# Altium PCB Main.PcbDoc (part 1 of 2)
Units mil, origin at the board's own origin, x right, y up, seen from the top; angles counter-clockwise.
Board outline 12846.15 x 9153.85 mil, 2 copper layers (TopLayer, BottomLayer); 186 components, 153 nets, 590 pads, 304 vias.
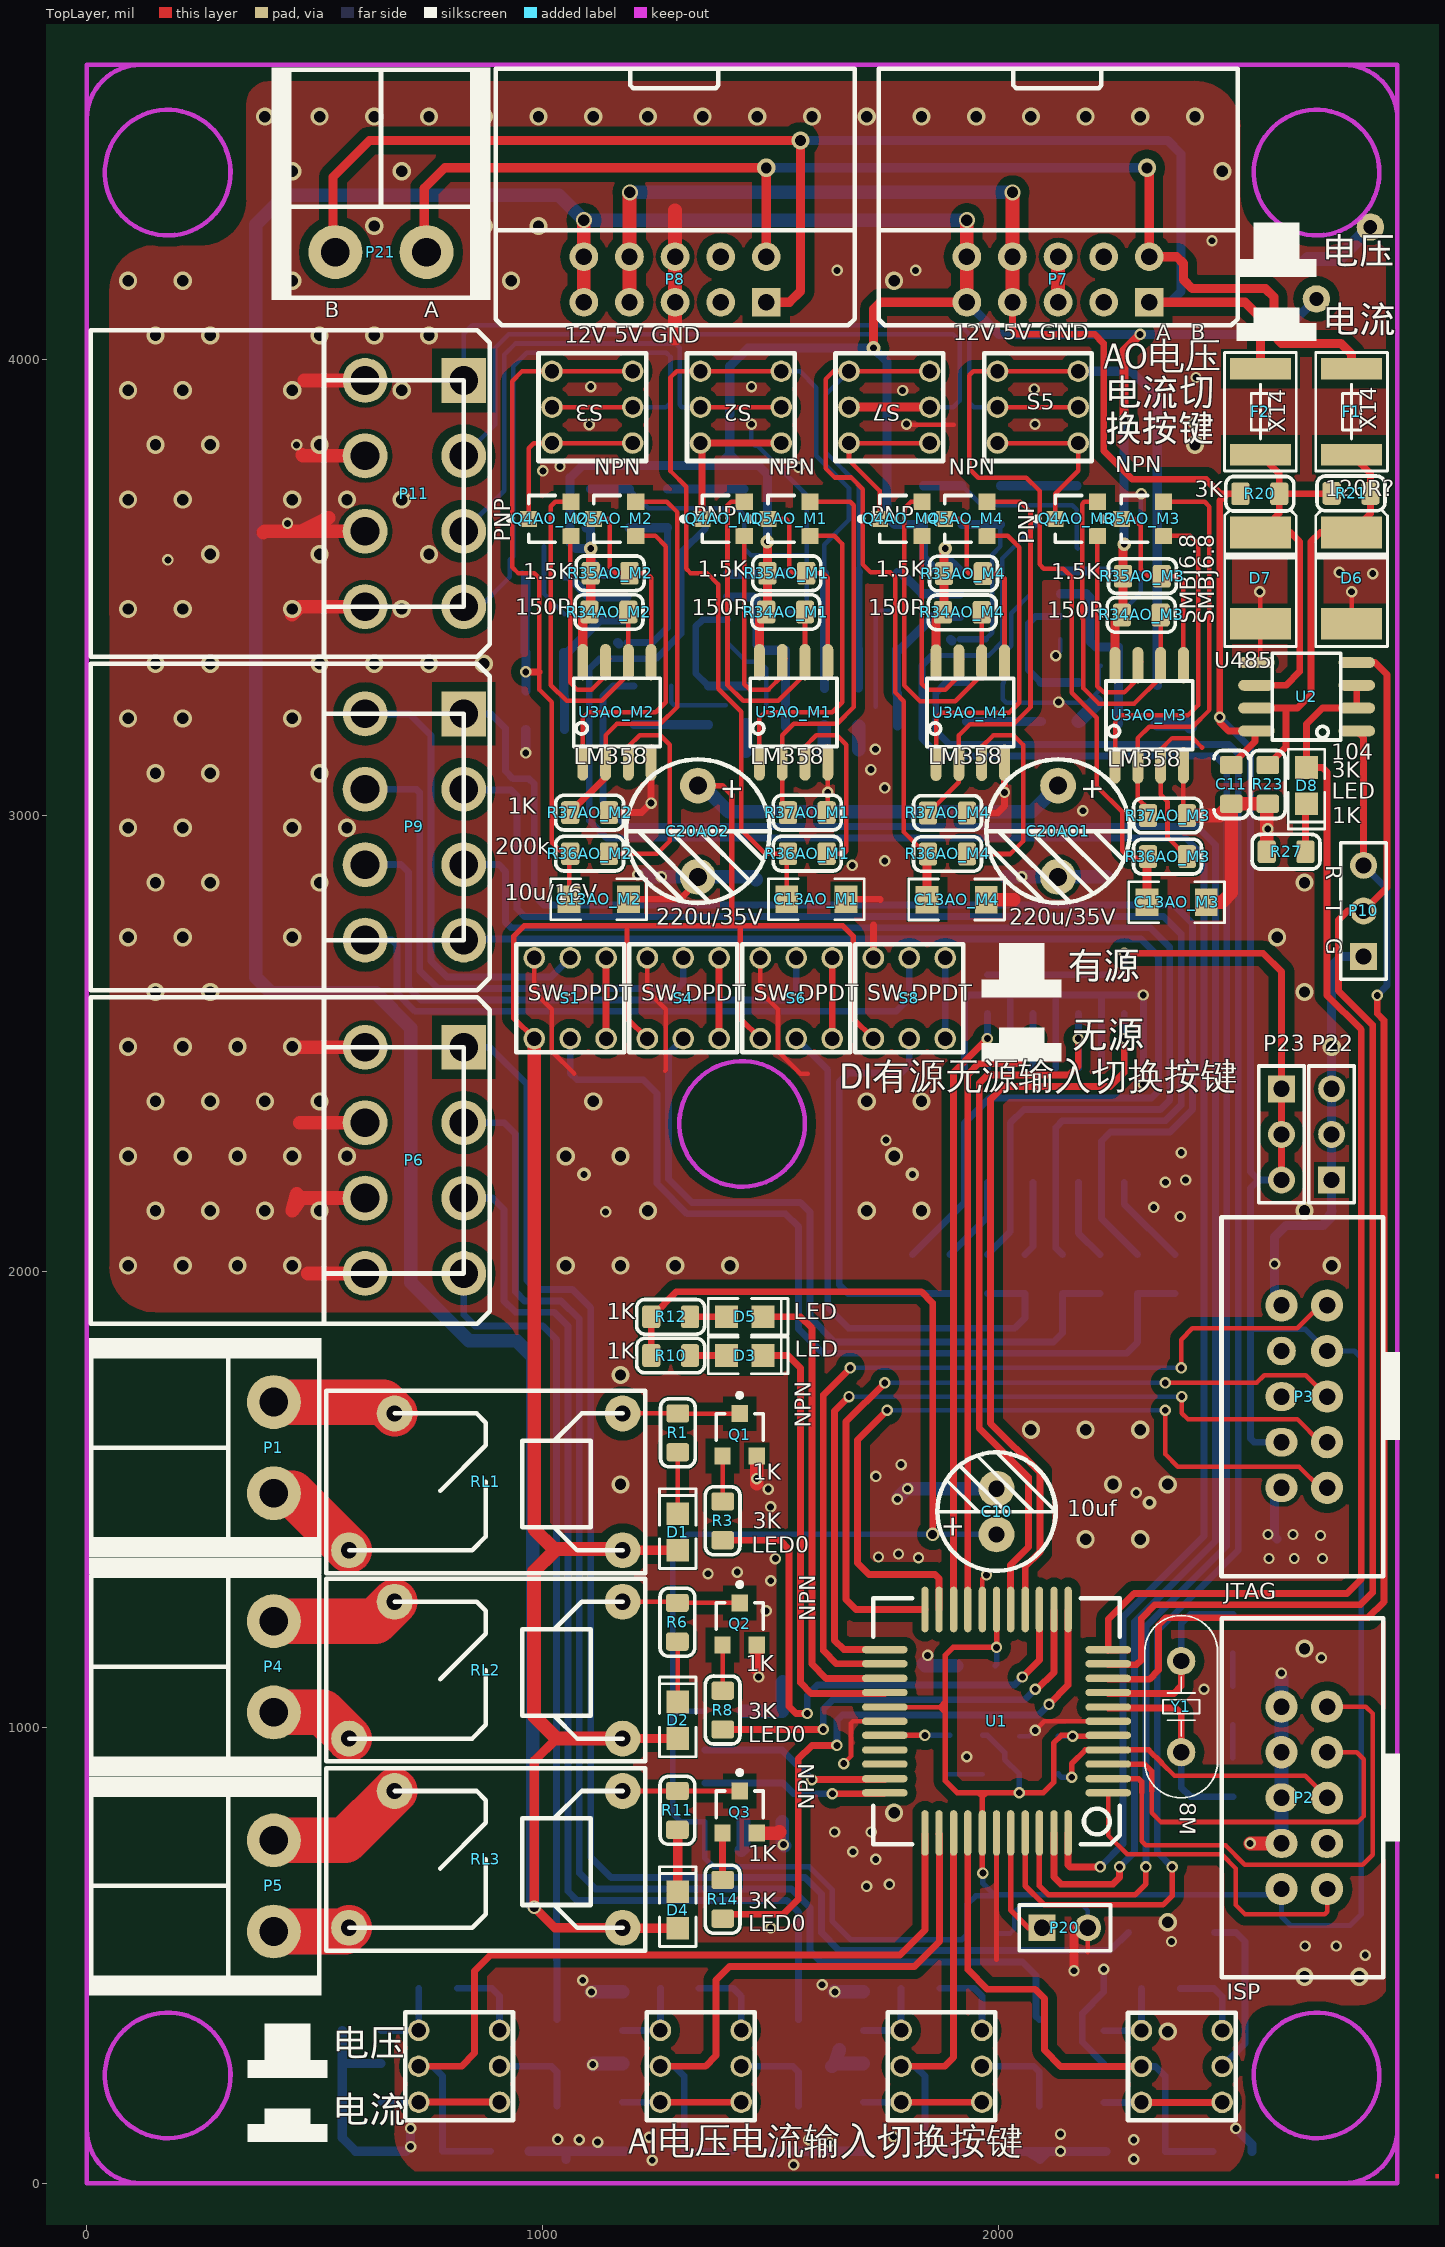
[diagram p0: TopLayer view]
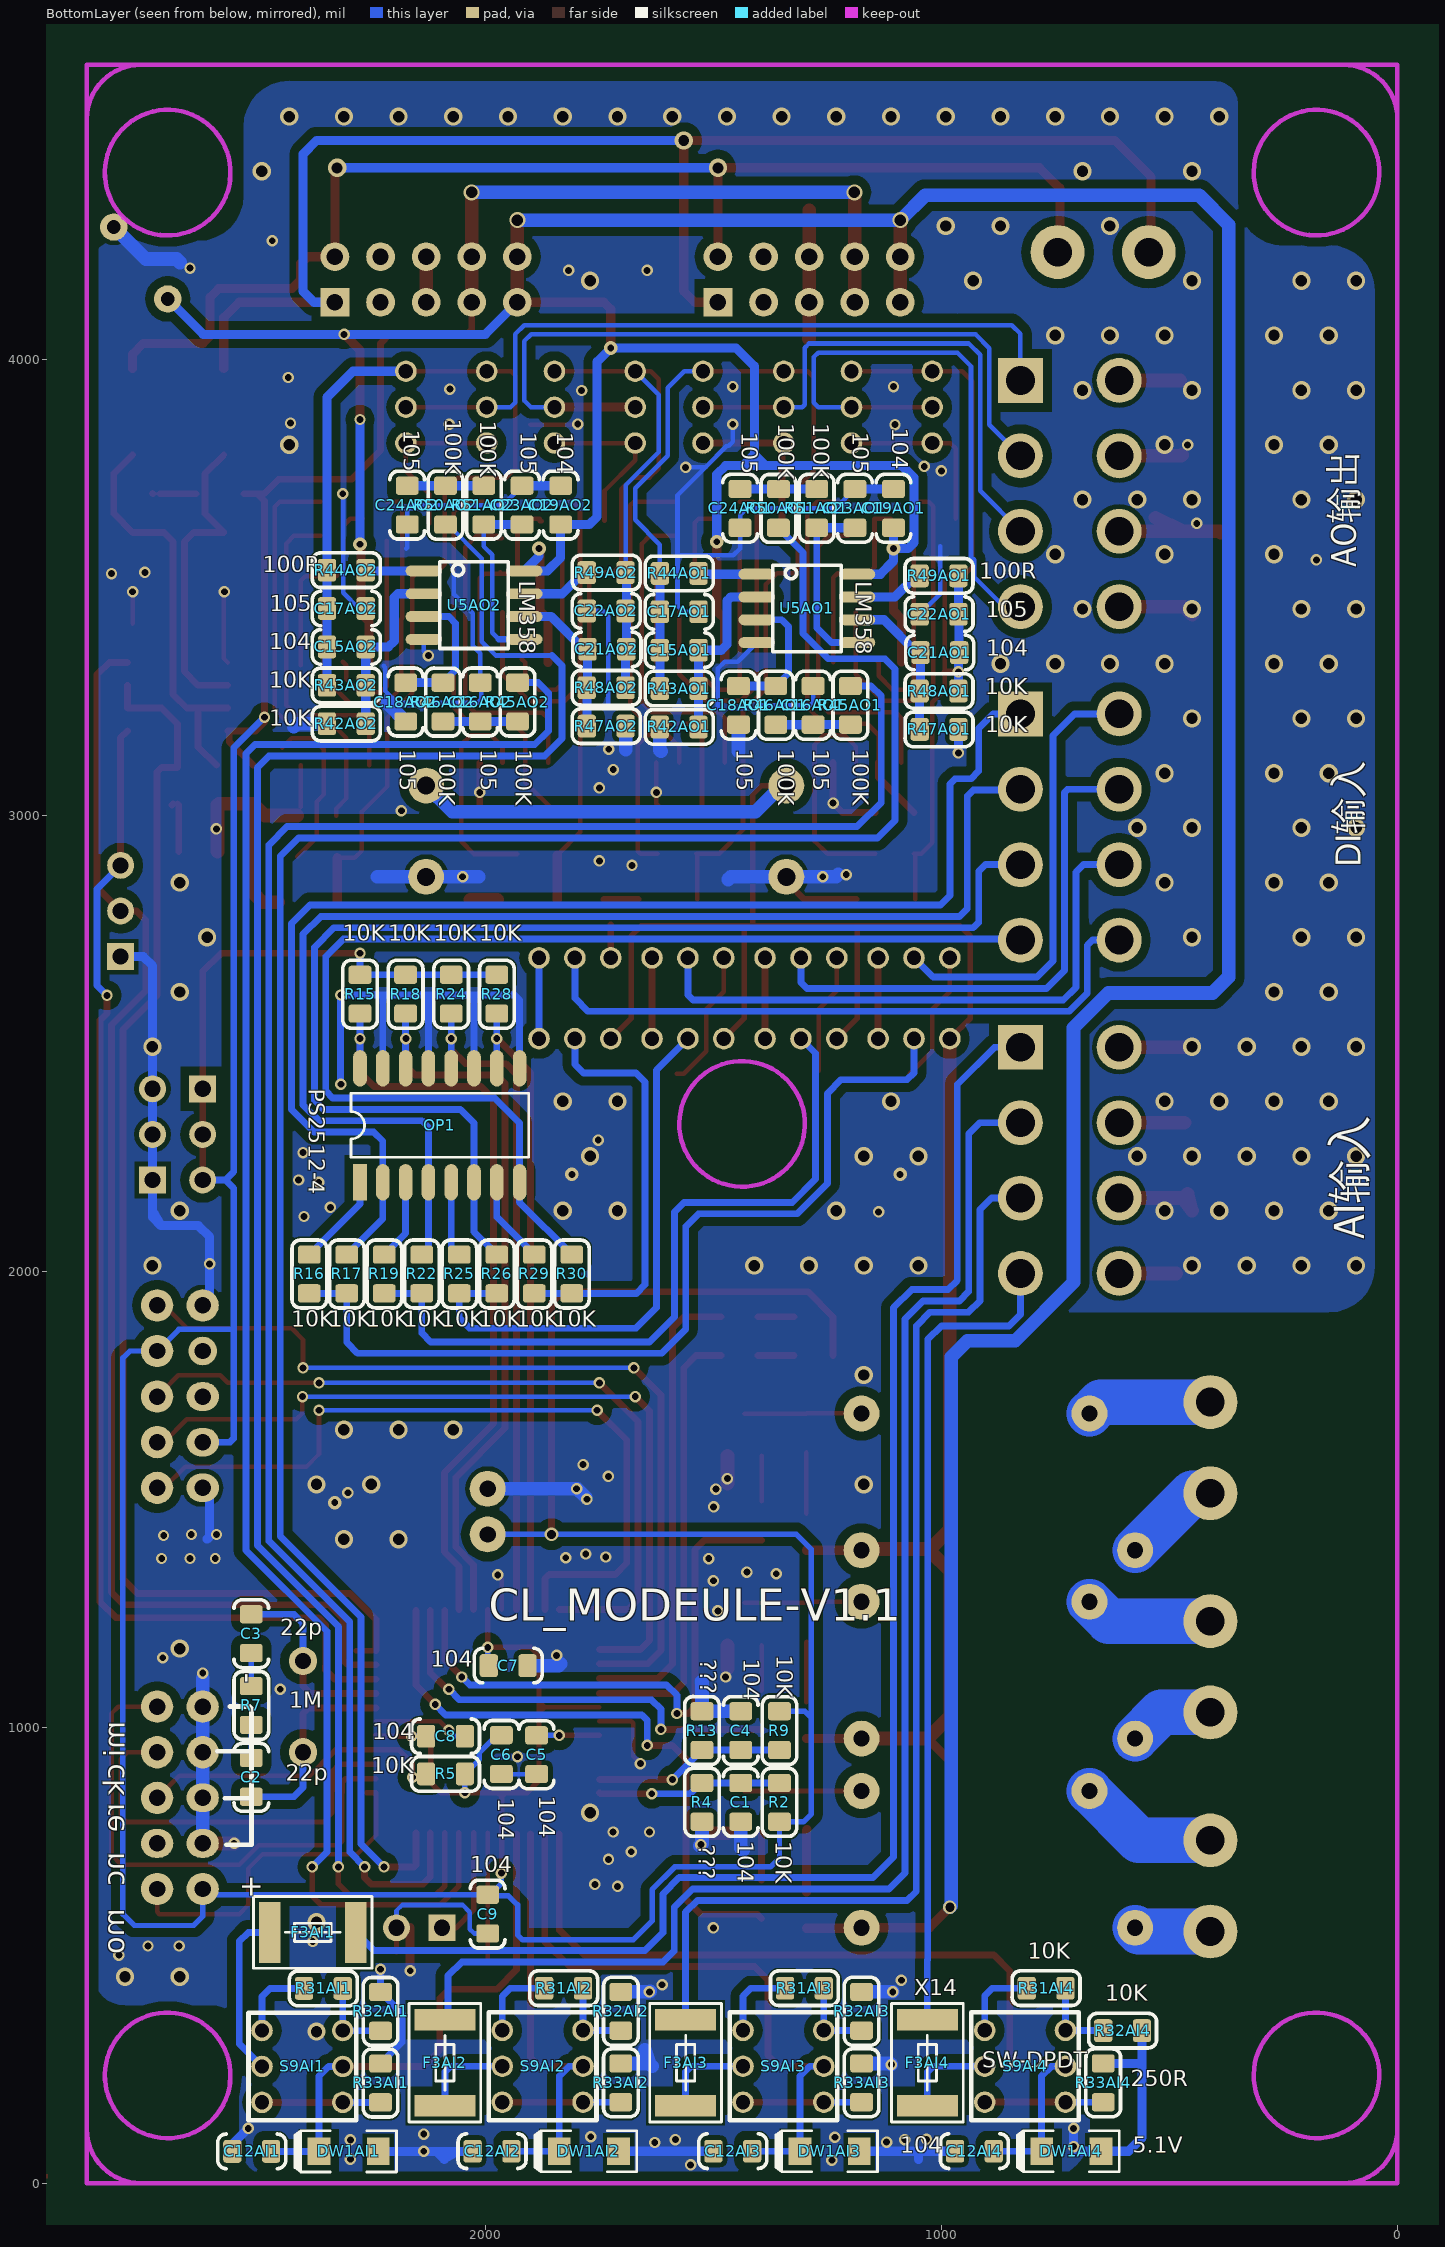
[diagram p1: BottomLayer view, seen from below]
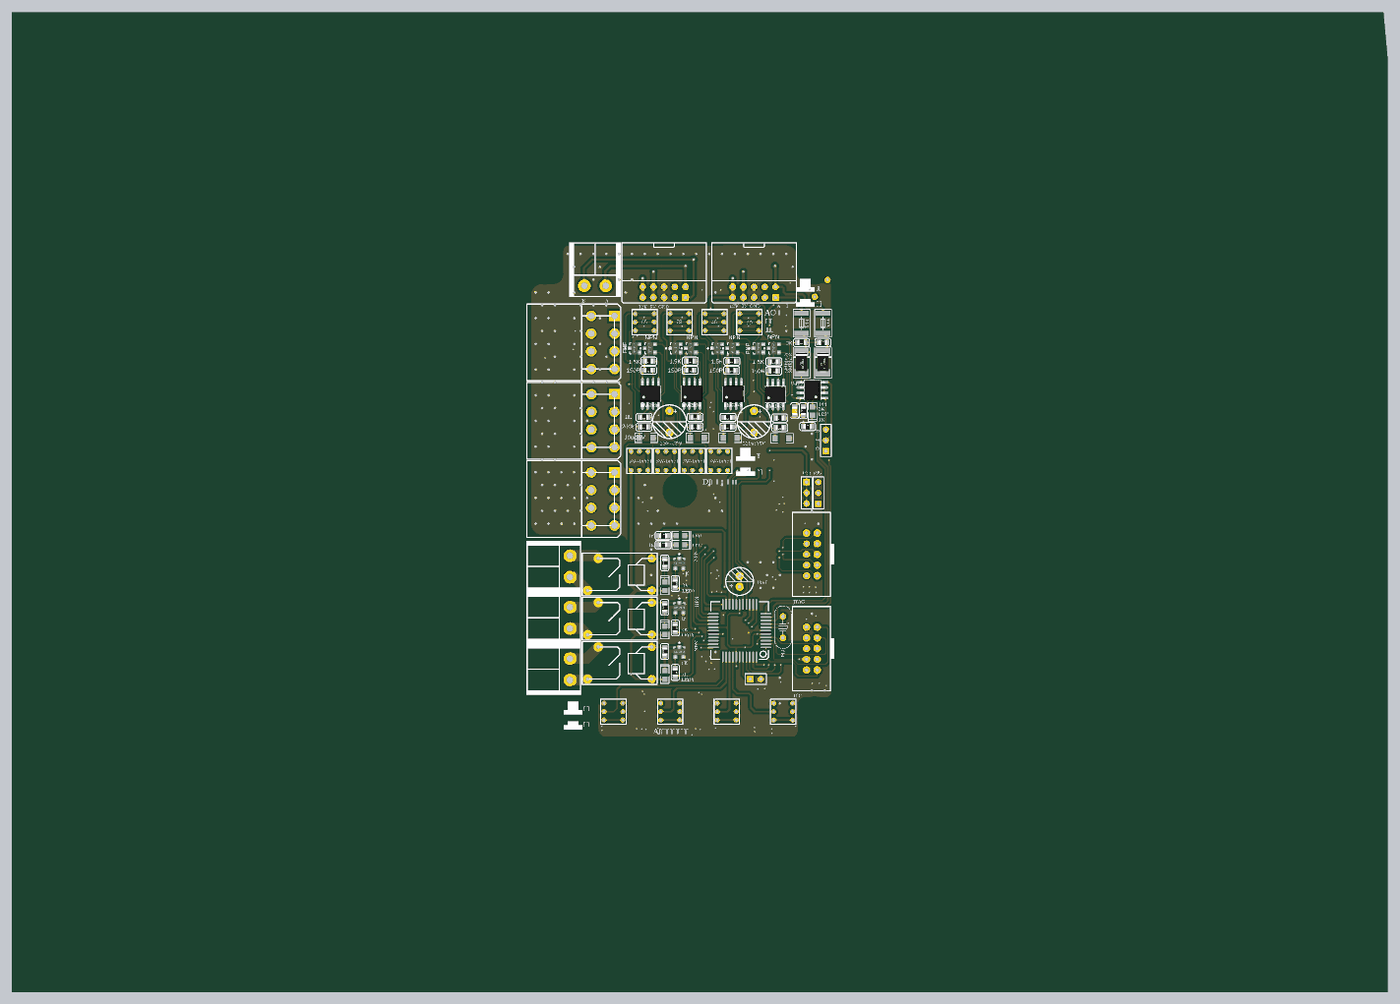
[diagram p3: 3D render of the assembled board from above, using the file's embedded part models]
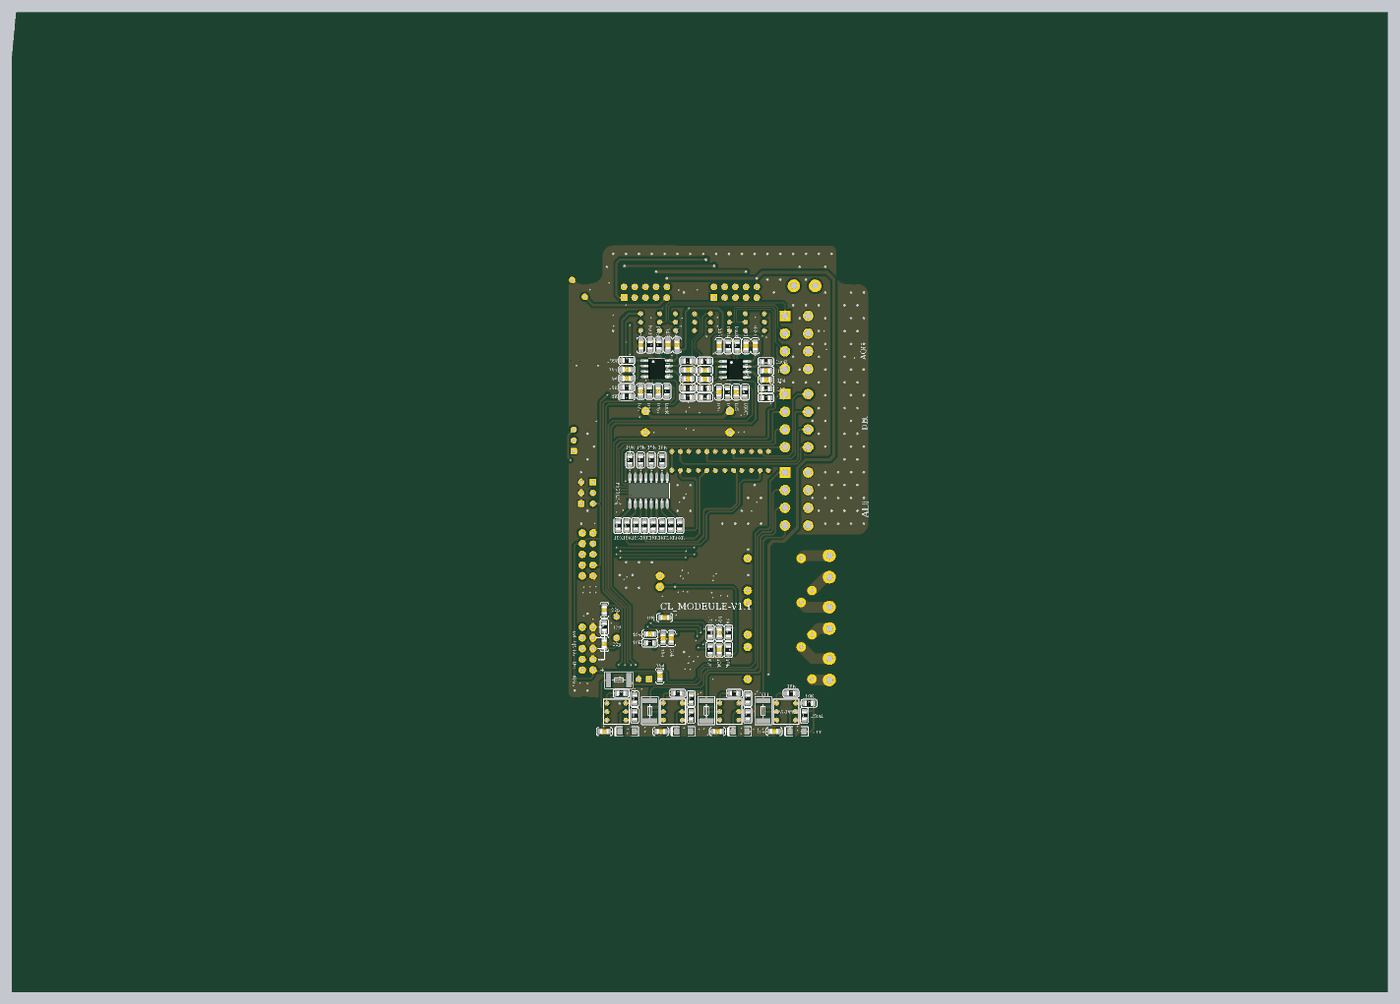
[diagram p4: 3D render of the assembled board from below, using the file's embedded part models]

## Layer stack, top to bottom
TopSolder: solder mask 0.4, Solder Resist, Dk 3.5
TopLayer: signal copper 1.4
Dielectric1: dielectric 12.6, FR-4, Dk 4.8
BottomLayer: signal copper 1.4
BottomSolder: solder mask 0.4, Solder Resist, Dk 3.5

## Board outline
8007.31,6789.27 -4800.38,6789.27 -4800.38,-2364.57 8045.77,-2364.57 8045.77,6366.19

## Design rules (kind name [scope] priority, off if disabled: settings)
Clearance Clearance_1 [All] p1 off: gap=20
Clearance [All] p2: gap=10
ComponentClearance [All] p1 off: gap=10 collisioncheckmode=3 verticalgap=10 showdistances=FALSE
FabricationTestPointUsage TestPointUsage [All] p1: valid=0 allowmultiple=FALSE
FabricationTestpoint Testpoint [All] p1: side=3 testpointundercomponent=TRUE minsize=40 maxsize=100 preferedsize=60 minholesize=20 maxholesize=40 preferedholesize=32 testpointgrid=1 allowsidetop=TRUE allowsidebottom=TRUE usegrid=TRUE gridtolerance=0.01
PolygonConnect PolygonConnect_1 [All vs (InPadClass('All Pads'))] p1: connectstyle=NoConnect reliefconductorwidth=10 reliefentries=4 polygonreliefangle="90 Angle" airgapwidth=10
PolygonConnect [All] p2: connectstyle=Direct reliefconductorwidth=10 reliefentries=4 polygonreliefangle="90 Angle" airgapwidth=10
RoomDefinition AI1 [InComponentClass('AI1')] p1: confinementstyle=ConfineIn formatcopy=TRUE lockcomponents=FALSE outline 2175,-31.9 2175,499.62 2735,499.62 2735,-31.9
RoomDefinition AI2 [InComponentClass('AI2')] p2: confinementstyle=ConfineIn formatcopy=TRUE lockcomponents=FALSE outline 1647.98,-31.53 1647.98,499.99 2207.98,499.99 2207.98,-31.53
RoomDefinition AI3 [InComponentClass('AI3')] p3: confinementstyle=ConfineIn formatcopy=TRUE lockcomponents=FALSE outline 1120,-31.53 1120,499.99 1680,499.99 1680,-31.53
RoomDefinition AI4 [InComponentClass('AI4')] p4: confinementstyle=ConfineIn formatcopy=TRUE lockcomponents=FALSE outline 590,-31.52 590,500 1150,500 1150,-31.52
RoomDefinition AO_M1 [InComponentClass('AO_M1')] p5: confinementstyle=ConfineIn formatcopy=TRUE lockcomponents=FALSE outline 6150,4915 5170,4915 5170,5300 6150,5300
RoomDefinition AO_M2 [InComponentClass('AO_M2')] p6: confinementstyle=ConfineIn formatcopy=TRUE lockcomponents=FALSE outline 6125,4320 5145,4320 5145,4705 6125,4705
RoomDefinition AO_M3 [InComponentClass('AO_M3')] p7: confinementstyle=ConfineIn formatcopy=TRUE lockcomponents=FALSE outline 4970,5215 4970,4235 4585,4235 4585,5215
RoomDefinition AO_M4 [InComponentClass('AO_M4')] p8: confinementstyle=ConfineIn formatcopy=TRUE lockcomponents=FALSE outline 4140,4215 4140,5195 4525,5195 4525,4215
RoomDefinition AO1 [InComponentClass('AO1')] p9: confinementstyle=ConfineIn formatcopy=TRUE lockcomponents=FALSE outline 2950,5679.38 2950,4830 2247.01,4830 2247.01,5679.38
RoomDefinition AO2 [InComponentClass('AO2')] p10: confinementstyle=ConfineIn formatcopy=TRUE lockcomponents=FALSE outline 3865,5075 3865,4230.69 3164.61,4230.69 3164.61,5075
RoomDefinition Main [InComponentClass('Main')] p11: confinementstyle=ConfineIn formatcopy=TRUE lockcomponents=FALSE outline -4227.5,-6740 19052.5,-6740 19052.5,-5730 -4227.5,-5730
RoutingVias [All] p1: holewidth=24 width=40 viastyle="Through Hole" minholewidth=24 minwidth=40 maxholewidth=24 maxwidth=40
SilkToSolderMaskClearance SilkscreenOverComponentPads [IsPad] p1: minsilkscreentomaskgap=10 clearancetoexposedcopper=TRUE
SolderMaskExpansion [All] p1: expansion=4
Width [All] p1: maxlimit=300 minlimit=10 preferedwidth=10 minimp=50.000000 maximp=50.000000 favimp=50.000000
25 further rules are at their usual default settings.

## Classes and differential pairs
channel class ADC: AI1 AI2 AI3 AI4 AI5 AI6 AI7 AI8
component class AO1: C15AO1 C16AO1 C17AO1 C18AO1 C19AO1 C20AO1 C21AO1 C22AO1 C23AO1 C24AO1 R42AO1 R43AO1 R44AO1 R45AO1 R46AO1 R47AO1 R48AO1 R49AO1 R50AO1 R51AO1 U5AO1
component class AO2: C15AO2 C16AO2 C17AO2 C18AO2 C19AO2 C20AO2 C21AO2 C22AO2 C23AO2 C24AO2 R42AO2 R43AO2 R44AO2 R45AO2 R46AO2 R47AO2 R48AO2 R49AO2 R50AO2 R51AO2 U5AO2
channel class PWM: X1 X2
component class Main: C1 C2 C3 C4 C5 C6 C7 C8 C9 C10 C11 D1 D2 D3 D4 D5 D6 D7 D8 F1 F2 OP1 P1 P2 P3 P4 P5 P6 P7 P8 P9 P10 P11 P20 P21 P22 P23 Q1 Q2 Q3 R1 R2 R3 R4 R5 R6 R7 R8 R9 R10 R11 R12 R13 R14 R15 R16 R17 R18 R19 R20 R21 R22 R23 R24 R25 R26 R27 R28 R29 R30 RL1 RL2 RL3 S1 S2 S3 S4 S5 S6 S7 S8 U1 U2 Y1
component class AO_M1: C13AO_M1 Q4AO_M1 Q5AO_M1 R34AO_M1 R35AO_M1 R36AO_M1 R37AO_M1 U3AO_M1
component class AO_M2: C13AO_M2 Q4AO_M2 Q5AO_M2 R34AO_M2 R35AO_M2 R36AO_M2 R37AO_M2 U3AO_M2
channel class mA: X1 X2
component class AI1: C12AI1 DW1AI1 F3AI1 R31AI1 R32AI1 R33AI1 S9AI1
component class AI2: C12AI2 DW1AI2 F3AI2 R31AI2 R32AI2 R33AI2 S9AI2
component class AI3: C12AI3 DW1AI3 F3AI3 R31AI3 R32AI3 R33AI3 S9AI3
component class AI4: C12AI4 DW1AI4 F3AI4 R31AI4 R32AI4 R33AI4 S9AI4
component class AO_M3: C13AO_M3 Q4AO_M3 Q5AO_M3 R34AO_M3 R35AO_M3 R36AO_M3 R37AO_M3 U3AO_M3
component class AO_M4: C13AO_M4 Q4AO_M4 Q5AO_M4 R34AO_M4 R35AO_M4 R36AO_M4 R37AO_M4 U3AO_M4

## Components (designator, comment, footprint, x,y, rotation, side; value= is the part's Value field where it differs from the comment)
C1 "104" C0805C 1440,835 r270 bottom
C2 "22p" c0805c 2513.5,890 r90 bottom
C3 "22p" c0805c 2513.5,1205 r270 bottom
C4 "104" C0805C 1440,992.5 r90 bottom
C5 "104" c0805c 1887.74,939.5 r90 bottom
C6 "104" c0805c 1965,940 r90 bottom
C7 "104" c0805c 1950,1135 r0 bottom
C8 "104" c0805c 2087.5,980 r0 bottom
C9 "104" c0805c 1995,590 r270 bottom
C10 "10uf" E6.5MM 1995,1422.84 r90 top
C11 "104" C0805C 2510,3067.5 r270 top
C12AI1 "104" C0805C 2512.5,69.62 r0 bottom (schematic designator C12)
C12AI2 "104" C0805C 1985.48,69.99 r0 bottom (schematic designator C12)
C12AI3 "104" C0805C 1457.5,69.99 r0 bottom (schematic designator C12)
C12AI4 "104" C0805C 927.5,70 r0 bottom (schematic designator C12)
C13AO_M1 "10u/16V" 1206 1600,2815.71 r0 top (schematic designator C13)
C13AO_M2 "10u/16V" 1206 1122.54,2815.71 r0 top (schematic designator C13)
C13AO_M3 "10u/16V" 1206 2390,2809.29 r0 top (schematic designator C13)
C13AO_M4 "10u/16V" 1206 1907.5,2815 r0 top (schematic designator C13)
C15AO1 "104" C0805C 1574.89,3361.98 r0 bottom (schematic designator C15)
C15AO2 "104" C0805C 2304.89,3369.14 r0 bottom (schematic designator C15)
C16AO1 "105" c0805c 1281.3,3241.17 r270 bottom (schematic designator C16)
C16AO2 "105" c0805c 2011.3,3248.32 r270 bottom (schematic designator C16)
C17AO1 "105" C0805C 1574.89,3446.26 r180 bottom (schematic designator C17)
C17AO2 "105" C0805C 2304.89,3453.41 r180 bottom (schematic designator C17)
C18AO1 "105" c0805c 1444.91,3241.17 r90 bottom (schematic designator C18)
C18AO2 "105" c0805c 2174.91,3248.32 r90 bottom (schematic designator C18)
C19AO1 "104" C0805C 1104.91,3673.07 r270 bottom (schematic designator C19)
C19AO2 "104" C0805C 1834.91,3680.22 r270 bottom (schematic designator C19)
C20AO1 "220u/35V" E8MM 2130,2965 r270 top (schematic designator C20)
C20AO2 "220u/35V" E8MM 1340,2965 r270 top (schematic designator C20)
C21AO1 "104" C0805C 1003.39,3356.74 r180 bottom (schematic designator C21)
C21AO2 "104" C0805C 1733.39,3363.89 r180 bottom (schematic designator C21)
C22AO1 "105" C0805C 1005.03,3440.82 r0 bottom (schematic designator C22)
C22AO2 "105" C0805C 1735.04,3447.98 r0 bottom (schematic designator C22)
C23AO1 "105" C0805C 1189.55,3673.07 r90 bottom (schematic designator C23)
C23AO2 "105" C0805C 1919.55,3680.22 r90 bottom (schematic designator C23)
C24AO1 "105" C0805C 1441.42,3673.07 r270 bottom (schematic designator C24)
C24AO2 "105" C0805C 2171.42,3680.22 r270 bottom (schematic designator C24)
D1 "LED0" LED0805 1296,1388 r270 top
D2 "LED0" LED0805 1296,975 r270 top
D3 "LED" LED0805 1402.84,1815 r180 top
D4 "LED0" LED0805 1296,558.84 r270 top
D5 "LED" LED0805 1402.84,1900 r180 top
D6 "SMBJ6.8" SMBJ_SMT 2773.74,3520 r90 top
D7 "SMBJ6.8" SMBJ_SMT 2573.74,3520 r90 top
D8 "LED" LED0805 2675,3105 r90 top
DW1AI1 "5.1V" 1206AK 2300,69.62 r0 bottom (schematic designator DW1)
DW1AI2 "5.1V" 1206AK 1772.98,69.99 r0 bottom (schematic designator DW1)
DW1AI3 "5.1V" 1206AK 1245,69.99 r0 bottom (schematic designator DW1)
DW1AI4 "5.1V" 1206AK 715,70 r0 bottom (schematic designator DW1)
F1 "X14" PPTC_SMT 2773.74,3885 r270 top
F2 "X14" PPTC_SMT 2573.74,3885 r270 top
F3AI1 "X14" PPTC_SMT 2378.75,550 r0 bottom (schematic designator F3)
F3AI2 "X14" PPTC_SMT 2088.84,263.81 r270 bottom (schematic designator F3)
F3AI3 "X14" PPTC_SMT 1560.86,263.81 r270 bottom (schematic designator F3)
F3AI4 "X14" PPTC_SMT 1030.86,263.82 r270 bottom (schematic designator F3)
OP1 "PS2512-4" SO_16 2100,2320 r180 bottom
P1 "DO1" PL2Q 410,1613 r270 top
P2 "ISP" FC10 2670,845 r270 top
P3 "JTAG" FC10P 2669.97,1725 r270 top
P4 "DO2" PL2Q 410,1132.44 r270 top
P5 "DO3" PL2Q 409.98,651.84 r270 top
P6 "AI输入" "8P _COM" 718.27,2243.03 r270 top locked
P7 "Header 10H" FC10P_wan 2130,4175 r180 top locked
P8 "Header 10H" FC10P_wan 1290,4175 r180 top locked
P9 "DI输入" "8P _COM" 718.27,2974.3 r270 top locked
P10 "Header 3" HDR1X3 2800,2690 r90 top
P11 "AO输出" "8P _COM" 718.27,3705.56 r270 top locked
P20 "Header 2" HDR1X2 2095,560 r0 top
P21 "DO3" PL2Q 645,4235 r180 top
P22 "Header 3" HDR1X3 2730,2200 r90 top
P23 "Header 3" HDR1X3 2620,2400 r270 top
Q1 "NPN" SOT23 1431.79,1641.26 r0 top
Q2 "NPN" SOT23 1431.79,1226.24 r0 top
Q3 "NPN" SOT23 1431.79,813.74 r0 top
Q4AO_M1 "PNP" SOT23 1395.43,3650 r90 top (schematic designator Q4)
Q4AO_M2 "PNP" SOT23 1015,3650 r90 top (schematic designator Q4)
Q4AO_M3 "PNP" SOT23 2170,3650 r90 top (schematic designator Q4)
Q4AO_M4 "PNP" SOT23 1785,3650 r90 top (schematic designator Q4)
Q5AO_M1 "NPN" SOT23 1540,3650 r90 top (schematic designator Q5)
Q5AO_M2 "NPN" SOT23 1157.54,3650 r90 top (schematic designator Q5)
Q5AO_M3 "NPN" SOT23 2315,3650 r90 top (schematic designator Q5)
Q5AO_M4 "NPN" SOT23 1927.5,3650 r90 top (schematic designator Q5)
R1 "1K" 0805R 1296,1645.5 r90 top
R2 "10K" 0805R 1355,835 r270 bottom
R3 "3K" 0805R 1394.38,1452.5 r270 top
R4 "???" 0805R 1525,835 r90 bottom
R5 "10K" 0805R 2087.5,897.5 r180 bottom
R6 "1K" 0805R 1295,1230 r90 top
R7 "1M" 0805R 2513.5,1047.5 r90 bottom
R8 "3K" 0805R 1394.38,1037.5 r270 top
R9 "10K" 0805R 1355,992.5 r90 bottom
R10 "1K" 0805R 1280.33,1815 r0 top
R11 "1K" 0805R 1295,817.5 r90 top
R12 "1K" 0805R 1280.33,1900 r0 top
R13 "???" 0805R 1525,992.5 r270 bottom
R14 "3K" 0805R 1394.38,622.5 r270 top
R15 "10K" 0805R 2275,2607.5 r90 bottom
R16 "10K" 0805R 2386.29,1993.88 r90 bottom
R17 "10K" 0805R 2304.03,1993.88 r90 bottom
R18 "10K" 0805R 2175,2607.5 r90 bottom
R19 "10K" 0805R 2221.78,1993.88 r90 bottom
R20 "3K" 0805R 2572.5,3705 r180 top
R21 "120R?" 0805R 2772.5,3705.88 r0 top
R22 "10K" 0805R 2139.52,1993.88 r90 bottom
R23 "3K" 0805R 2590,3067.5 r90 top
R24 "10K" 0805R 2075,2607.5 r90 bottom
R25 "10K" 0805R 2057.26,1993.88 r90 bottom
R26 "10K" 0805R 1975,1993.88 r90 bottom
R27 "1K" 0805R 2630,2920 r0 top
R28 "10K" 0805R 1975,2607.5 r90 bottom
R29 "10K" 0805R 1892.74,1993.88 r90 bottom
R30 "10K" 0805R 1810.48,1993.88 r90 bottom
R31AI1 "10K" 0805R 2355.33,427.12 r180 bottom (schematic designator R31)
R31AI2 "10K" 0805R 1828.32,427.49 r180 bottom (schematic designator R31)
R31AI3 "10K" 0805R 1300.33,427.49 r180 bottom (schematic designator R31)
R31AI4 "10K" 0805R 770.34,427.5 r180 bottom (schematic designator R31)
R32AI1 "10K" 0805R 2230,376.5 r90 bottom (schematic designator R32)
R32AI2 "10K" 0805R 1702.98,376.87 r90 bottom (schematic designator R32)
R32AI3 "10K" 0805R 1175,376.87 r90 bottom (schematic designator R32)
R32AI4 "10K" 0805R 602.5,334.38 r180 bottom (schematic designator R32)
R33AI1 "250R" 0805R 2230,219.62 r90 bottom (schematic designator R33)
R33AI2 "250R" 0805R 1702.98,219.99 r90 bottom (schematic designator R33)
R33AI3 "250R" 0805R 1175,219.99 r90 bottom (schematic designator R33)
R33AI4 "250R" 0805R 645,220 r90 bottom (schematic designator R33)
R34AO_M1 "150R" 0805R 1532.5,3445.71 r180 top (schematic designator R34)
R34AO_M2 "150R" 0805R 1145.04,3445.71 r180 top (schematic designator R34)
R34AO_M3 "150R" 0805R 2312.5,3439.29 r180 top (schematic designator R34)
R34AO_M4 "150R" 0805R 1920,3445 r180 top (schematic designator R34)
R35AO_M1 "1.5K" 0805R 1535,3530.71 r180 top (schematic designator R35)
R35AO_M2 "1.5K" 0805R 1147.54,3530.71 r180 top (schematic designator R35)
R35AO_M3 "1.5K" 0805R 2315,3524.29 r180 top (schematic designator R35)
R35AO_M4 "1.5K" 0805R 1922.5,3530 r180 top (schematic designator R35)
R36AO_M1 "200k" 0805R 1580,2915.71 r180 top (schematic designator R36)
R36AO_M2 "200k" 0805R 1102.54,2915.71 r180 top (schematic designator R36)
R36AO_M3 "200k" 0805R 2370,2909.29 r180 top (schematic designator R36)
R36AO_M4 "200k" 0805R 1887.5,2915 r180 top (schematic designator R36)
R37AO_M1 "1K" 0805R 1580,3005.71 r180 top (schematic designator R37)
R37AO_M2 "1K" 0805R 1102.54,3005.71 r180 top (schematic designator R37)
R37AO_M3 "1K" 0805R 2370,2999.29 r180 top (schematic designator R37)
R37AO_M4 "1K" 0805R 1887.5,3005 r180 top (schematic designator R37)
R42AO1 "10K" 0805R 1574.99,3193.62 r0 bottom (schematic designator R42)
R42AO2 "10K" 0805R 2304.99,3200.77 r0 bottom (schematic designator R42)
R43AO1 "10K" 0805R 1574.89,3277.8 r180 bottom (schematic designator R43)
R43AO2 "10K" 0805R 2304.89,3284.95 r180 bottom (schematic designator R43)
R44AO1 "100R" 0805R 1574.89,3530.35 r180 bottom (schematic designator R44)
R44AO2 "100R" 0805R 2304.89,3537.5 r180 bottom (schematic designator R44)
R45AO1 "100K" 0805R 1199.55,3241.17 r90 bottom (schematic designator R45)
R45AO2 "100K" 0805R 1929.55,3248.32 r90 bottom (schematic designator R45)
R46AO1 "100K" 0805R 1363.06,3241.07 r270 bottom (schematic designator R46)
R46AO2 "100K" 0805R 2093.06,3248.22 r270 bottom (schematic designator R46)
R47AO1 "10K" 0805R 1005.04,3188.28 r180 bottom (schematic designator R47)
R47AO2 "10K" 0805R 1735.03,3195.43 r180 bottom (schematic designator R47)
R48AO1 "10K" 0805R 1005.14,3272.46 r0 bottom (schematic designator R48)
R48AO2 "10K" 0805R 1735.14,3279.61 r0 bottom (schematic designator R48)
R49AO1 "100R" 0805R 1005.14,3525.01 r0 bottom (schematic designator R49)
R49AO2 "100R" 0805R 1735.14,3532.16 r0 bottom (schematic designator R49)
R50AO1 "100K" 0805R 1357.43,3672.96 r270 bottom (schematic designator R50)
R50AO2 "100K" 0805R 2087.43,3680.11 r270 bottom (schematic designator R50)
R51AO1 "100K" 0805R 1273.44,3673.07 r90 bottom (schematic designator R51)
R51AO2 "100K" 0805R 2003.44,3680.22 r90 bottom (schematic designator R51)
RL1 "" HF32A4 875,1538 r180 top locked
RL2 "" HF32A4 875,1125 r180 top locked
RL3 "" HF32A4 875,710 r180 top locked
S1 "SW-DPDT" button 1060,2598.58 r270 top
S2 "SW-DPDT" button 1434.27,3895 r180 top
S3 "SW-DPDT" button 1108.53,3895 r180 top
S4 "SW-DPDT" button 1307.91,2598.58 r270 top
S5 "SW-DPDT" button 2085.75,3895 r180 top
S6 "SW-DPDT" button 1555.83,2598.58 r270 top
S7 "SW-DPDT" button 1760.01,3895 r180 top
S8 "SW-DPDT" button 1803.74,2598.58 r270 top
S9AI1 "SW-DPDT" button 2401.42,255.88 r180 bottom (schematic designator S9)
S9AI2 "SW-DPDT" button 1874.4,256.25 r180 bottom (schematic designator S9)
S9AI3 "SW-DPDT" button 1346.42,256.25 r180 bottom (schematic designator S9)
S9AI4 "SW-DPDT" button 816.42,256.26 r180 bottom (schematic designator S9)
U1 "Atmega16" QFP44 1995,1013 r180 top
U2 "U485" SOP8 2675,3260 r90 top
U3AO_M1 "LM358" SOP-08 1550,3225.71 r0 top (schematic designator U3)
U3AO_M2 "LM358" SOP-08 1162.54,3225.71 r0 top (schematic designator U3)
U3AO_M3 "LM358" SOP-08 2330,3219.29 r0 top (schematic designator U3)
U3AO_M4 "LM358" SOP-08 1937.5,3225 r0 top (schematic designator U3)
U5AO1 "LM358" SOP-08 1294.91,3453.67 r270 bottom (schematic designator U5)
U5AO2 "LM358" SOP-08 2024.91,3460.82 r270 bottom (schematic designator U5)
Y1 "8M" XTAL-M 2400,1145 r270 top

## Footprints (in the part's own frame and the unit in brackets; to place one, negate y for a bottom-side part, rotate by r counter-clockwise, add the part's x,y. Pads: shape width x height; smd on the part's side, far side on the other; paste and mask are expansions set on the pad)
"8P _COM" [mm]
  rect 2.5x2.5 hole 1.6: 1(-6.3,2.75)
  round 2.5 hole 1.6: 2(-6.3,-2.75) 3(-2.1,2.75) 4(-2.1,-2.75) 5(2.1,2.75) 6(2.1,-2.75) 7(6.3,2.75) 8(6.3,-2.75)
  silkscreen extent -9.1,-18.04 9.1,4.2
0805R [mil]
  rrect30% 40x50 smd: 1(-42.5,0) 2(42.5,0)
  silkscreen extent -75,-38 75,38, body extent -39,-25 40,25, height 30
1206 [mil]
  rect 50x60 smd: 1(-65,0) 2(65,0)
  silkscreen extent -105,-45 105,45
1206AK [mil]
  rect 50x60 smd: A(-65,0) K(65,0)
  silkscreen extent -105,-45 118,45
button [mm]
  round 1.2 hole 0.8: 1(-2.25,0) 2(-2.25,2) 3(-2.25,-2) 4(2.25,0) 5(2.25,2) 6(2.25,-2)
  silkscreen extent -3,-3 3,3
C0805C [mil]
  rrect30% 40x50 smd: 1(-42.5,0) 2(42.5,0)
  silkscreen extent -75,-38 75,38, body extent -39,-25 39,25, height 30
c0805c [mil]
  rrect30% 40x50 smd: 1(-42.5,0) 2(42.5,0)
  silkscreen extent -75,-38 75,38, body extent -39,-25 39,25, height 30
E6.5MM [mm]
  round 2 hole 0.9: 1(0,0) 2(2.54,0)
  silkscreen extent -2.03,-3.3 4.57,3.3
E8MM [mm]
  round 2 hole 1: 1(-2.54,0) 2(2.54,0)
  silkscreen extent -4,-4 4,4, body extent -4.01,-4.04 4.01,3.99, height 7
FC10 [mil]
  round 70.87 hole 36: 1(200,50) 2(200,-50) 5(0,50) 7(-100,50) 8(-100,-50) 9(-200,50) 10(-200,-50)
  oval 62.99x70.87 hole 36: 3(100,50) 4(100,-50) 6(0,-50)
  silkscreen extent -394,-181 394,209
FC10P [mil]
  round 70.87 hole 36: 1(200,50) 3(100,50) 5(0,50) 7(-100,50) 9(-200,50) 10(-200,-50)
  oval 62.99x70.87 hole 36: 2(200,-50) 4(100,-50) 6(0,-50)
  round 62.99 hole 36: 8(-100,-50)
  silkscreen extent -394,-181 394,209
FC10P_wan [mil]
  rect 62.99x62.99 hole 36: 1(-200,50)
  round 62.99 hole 36: 2(-200,-50) 3(-100,50) 4(-100,-50) 5(0,50) 6(0,-50) 7(100,50) 8(100,-50) 9(200,50) 10(200,-50)
  silkscreen extent -394,-462 394,100
HDR1X2 [mm] "Connector; Header; 2 Position"
  rect 1.5x1.5 hole 0.9: 1(0,0)
  round 1.5 hole 0.9: 2(2.54,0)
  silkscreen extent -1.27,-1.27 3.81,1.27
HDR1X3 [mm] "Connector; Header; 3 Position"
  rect 1.5x1.5 hole 0.9: 1(0,0)
  round 1.5 hole 0.9: 2(2.54,0) 3(5.08,0)
  silkscreen extent -1.27,-1.27 6.35,1.27
HF32A4 [mm]
  round 2 hole 0.9: 1(-7.62,3.81) 2(-7.62,-3.81) 3(7.62,3.81) 4(5.08,-3.81)
  silkscreen extent -8.89,-5.08 8.89,5.08
LED0805 [mil]
  rect 50x50 smd: 1(0,0) 2(-80,0)
  silkscreen extent -135,-40 40,40
PL2Q [mm]
  round 3 hole 1.6: 1(-2.54,0) 2(2.54,0)
  silkscreen extent -6.1,-10.29 6.09,2.67
PPTC_SMT [mm]
  rect 1.2x3.4 smd: 1(-2.4,0) 2(2.4,0)
  silkscreen extent -3.3,-2 3.3,2, body extent -2.36,-2.08 2.62,2.08, height 0.5
QFP44 [mil]
  oval 100x16 smd: 1(-245,157) 2(-245,126) 3(-245,94) 4(-245,63) 5(-245,31) 6(-245,0) 7(-245,-31) 8(-245,-63) 9(-245,-94) 10(-245,-126) 11(-245,-157) 23(245,-157) 24(245,-126) 25(245,-94) 26(245,-63) 27(245,-31) 28(245,0) 29(245,31) 30(245,63) 31(245,94) 32(245,126) 33(245,157)
  oval 16x100 smd: 12(-157,-245) 13(-126,-245) 14(-94,-245) 15(-63,-245) 16(-31,-245) 17(0,-245) 18(31,-245) 19(63,-245) 20(94,-245) 21(126,-245) 22(157,-245) 34(157,245) 35(126,245) 36(94,245) 37(63,245) 38(31,245) 39(0,245) 40(-31,245) 41(-63,245) 42(-94,245) 43(-126,245) 44(-157,245)
  silkscreen extent -270,-270 270,270
SMBJ_SMT [mil]
  rect 70x133.86 smd: A(-100,0) K(100,0)
  silkscreen extent -150,-79 149,79, body extent -91,-53 91,53, height 94
SO_16 [mil]
  rect 30x80 smd: 1(-175,-125)
  oval 30x80 smd: 2(-125,-125) 3(-75,-125) 4(-25,-125) 5(25,-125) 6(75,-125) 7(125,-125) 8(175,-125) 9(175,125) 10(125,125) 11(75,125) 12(25,125) 13(-25,125) 14(-75,125) 15(-125,125) 16(-175,125)
  silkscreen extent -195,-70 195,70, body extent -194,-115 192,113, height 69
SOP8 [mil]
  oval 24x80 smd: 1(-75,-110) 2(-25,-110) 3(25,-110) 4(75,-110) 5(75,110) 6(25,110) 7(-25,110) 8(-75,110)
  silkscreen extent -95,-75 95,75, body extent -97,-118 96,118, height 61
SOP-08 [mil]
  oval 24x80 smd: 1(-75,-110) 2(-25,-110) 3(25,-110) 4(75,-110) 5(75,110) 6(25,110) 7(-25,110) 8(-75,110)
  silkscreen extent -95,-75 95,75, body extent -97,-118 96,118, height 61
SOT23 [mm]
  rect 0.9x0.95 smd: 1(0,1.175) 2(-0.95,-1.175) 3(0.95,-1.175)
  silkscreen extent -1.3,-0.3 1.3,2.32, body extent -1.45,-1.4 1.45,1.4, height 1.2
XTAL-M [mil]
  round 62 hole 35.43: 1(0,0) 2(200,0)
  silkscreen extent -100,-80 300,80

## Part data
C1 C4 C11 C12AI1 C12AI2 C12AI3 C12AI4 C13AO_M1 C13AO_M2 C13AO_M3 C13AO_M4 C15AO1 C15AO2 C17AO1 C17AO2 C19AO1 C19AO2 C21AO1 C21AO2 C22AO1 C22AO2 C23AO1 C23AO2 C24AO1 C24AO2: library part CAP, "Capacitor"
C2 C3 C5 C6 C7 C8 C9 C16AO1 C16AO2 C18AO1 C18AO2: library part Cap, "Capacitor"
C10: library part "Cap Pol1", "Polarized Capacitor (Radial)"
C20AO1 C20AO2: library part ELECTRO1, "Electrolytic Capacitor"
D1 D2 D4: "Typical INFRARED GaAs LED"
D6 D7 DW1AI1 DW1AI2 DW1AI3 DW1AI4: library part DIODE, "Diode"
F1 F2 F3AI1 F3AI2 F3AI3 F3AI4: library part "Fuse 1", "Fuse"
P1 P4 P5 P21: library part "Header 2", "Header, 2-Pin"
P2 P3: library part "Header 10H", "Header, 10-Pin, Right Angle"
P6 P9 P11: library part "Header 8", "Header, 8-Pin"
P7 P8: "Header, 10-Pin, Right Angle"
P10 P22 P23: "Header, 3-Pin"
P20: "Header, 2-Pin"
Q1 Q2 Q3 Q5AO_M1 Q5AO_M2 Q5AO_M3 Q5AO_M4: "NPN Bipolar Transistor"
Q4AO_M1 Q4AO_M2 Q4AO_M3 Q4AO_M4: "PNP Bipolar Transistor"
R1 R2 R3 R4 R5 R6 R7 R8 R9 R10 R11 R12 R13 R14 R16 R17 R19 R20 R21 R22 R23 R25 R26 R29 R30 R31AI1 R31AI2 R31AI3 R31AI4 R32AI1 R32AI2 R32AI3 R32AI4 R33AI1 R33AI2 R33AI3 R33AI4 R34AO_M1 R34AO_M2 R34AO_M3 R34AO_M4 R35AO_M1 R35AO_M2 R35AO_M3 R35AO_M4 R36AO_M1 R36AO_M2 R36AO_M3 R36AO_M4 R37AO_M1 R37AO_M2 R37AO_M3 R37AO_M4 R42AO1 R42AO2 R43AO1 R43AO2 R44AO1 R44AO2 R45AO1 R45AO2 R46AO1 R46AO2 R47AO1 R47AO2 R48AO1 R48AO2 R49AO1 R49AO2 R50AO1 R50AO2 R51AO1 R51AO2: library part Res2, "Resistor"
R15 R18 R24 R27 R28: library part res
RL1 RL2 RL3: library part RELAY
S1 S2 S3 S4 S5 S6 S7 S8 S9AI1 S9AI2 S9AI3 S9AI4: "Double-Pole, Double-Throw Switch"
Y1: library part XTAL, "Crystal Oscillator"

## Free pads (board coordinates)
  round 60 hole 30: 0(2815,4290) 2(2696.62,4132.35)

## Via types
v1: diameter 25, hole 15, TopLayer to BottomLayer, tented both sides, 148 vias
v2: diameter 40, hole 25, TopLayer to BottomLayer, tented both sides, 133 vias
v3: diameter 30, hole 15, TopLayer to BottomLayer, tented both sides, 8 vias
v4: diameter 24, hole 15, TopLayer to BottomLayer, tented both sides, 6 vias
v5: diameter 35, hole 25, TopLayer to BottomLayer, tented both sides, 4 vias
v6: diameter 40, hole 24, TopLayer to BottomLayer, tented both sides, 3 vias
v7: diameter 30, hole 20, TopLayer to BottomLayer, tented both sides, 2 vias

## Nets (pads, with @x,y where several pads share a name; then routed paths per layer and width w, separated by ;. In a path a pad name is that pad's centre, name@x,y a point inside that pad or via, vN(x,y) a via of type N, cw(c..) or ccw(c..) an arc to the next point about the centre after c; other vN are vias at no path point)
5V: C6.2 C7.2 C8.2 C9.1 C10.1 C11.1 P2.2 P3.4 P3.7 P7.7 P7.8 P8.7 P8.8 P23.1 P23.2 P23.3 R2.2 R5.2 R9.2 R10.1 R12.1 R15.2 R18.2 R20.2 R24.2 R28.2 U1.5 U1.17 U1.27 U1.38 U2.8 | length 13368
  TopLayer w10: U1.27@1750,1044 1870,1044 ; 1882.48,1030 1882.48,1031.52 1870,1044 ; 1882.48,1056.48 1870,1044
  TopLayer w12: 1882.48,1030 1882.48,882.52 1909,856 1972.5,856 ; 1882.48,1031.52 1882.48,1157.48 1900,1175 v1(1995,1175) U1.17@1995,1258 ; 1955.5,856 1964,847.5 ; v1(1965,680) 1964,681 U1.38@1964,768 1964,847.5 ; U1.5@2240,982 2238.05,980.05 v1(2162,980.05) 2160.05,982 2137,982 2120,965 2120,879 2097,856 v1(2045,856) 1972.5,856 ; 1964,847.5 1972.5,856
  TopLayer w15: R10.1@1237.83,1815 R12.1@1237.83,1900 1292.83,1955 1830,1955 1855,1930 v7(1855,1422.84) ; P7.7@2030,4125 2030,4064.61 2039.61,4055 2210,4055 2230,4035 2230,3800 2293.21,3736.79 2454.1,3736.79 2485.89,3705 2500,3705 ; v1(2275,2697.17) 2580,2697.17 2620,2657.17 P23.2@2620,2300 P23.3@2620,2200 ; C11.1@2510,3110 2561.82,3161.82 2561.82,3181.82 U2.8@2565,3185 2504.29,3185 2484.5,3204.79 v1(2484.5,3215) 2484.5,3689.5 2500,3705 ; R20.2@2530,3705 2500,3705 ; P3.7@2705,1825 P3.7@2719.97,1825
  TopLayer w30: P8.7@1190,4125 P8.8@1190,4225 1190,4365 v5(1191,4366) ; P7.7@2030,4125 P7.8@2030,4225 v5(2030,4366)
  BottomLayer w12: R9.2@1355,1035 1300,1035 1285,1020 ; v1(1965,680) 1965,657.5 1992.5,630 1949.55,630 1929.55,610 1929.55,544.55 1918.5,533.5 1675.86,533.5 1634.36,575 1634.36,643.88 1584.73,693.5 1375,693.5 1355,713.5 R2.2@1355,792.5 1302.5,792.5 1285,810 1285,1020 ; C6.2@1965,982.5 1974.39,982.5 2013,943.89 2013,929.5 R5.2@2045,897.5 v1(2045,856) ; C7.2@1992.5,1135 1995,1137.5 v1(1995,1175) ; C10.1@1995,1422.84 1317.84,1422.84 1285,1390 1285,1020 ; C9.1@1995.43,632.93 2607.93,632.93 P2.2@2620,645 2620,585 2640,565 2770,565 2795,590 2795,1810 2780,1825 P3.7@2719.97,1825 2672.48,1872.5 2554.07,1872.5 2552,1874.57 ; C8.2@2130,980 v1(2162,980.05)
  BottomLayer w15: R28.2@1975,2650 R24.2@2075,2650 R18.2@2175,2650 R15.2@2275,2650 v1(2275,2697.17) ; v1(2484.5,3215) 2552,3147.5 2552,2218 2570,2200 ; P3.4@2619.97,1625 2560,1625 2552,1633 2552,1874.57 2552,2182 2570,2200 ; P23.3@2620,2200 2570,2200
  BottomLayer w30: v5(1191,4366) v5(2030,4366)
10V1: C13AO_M1.1 C15AO1.2 C17AO1.1 R36AO_M1.2 R43AO1.1 R44AO1.1 S2.3 S2.6 | length 2355.4
  TopLayer w10: S2.3@1522.85,3973.74 S2.6@1345.69,3973.74 1293.28,3973.74 1280,3960.46 1280,3755 1314.54,3720.46 1314.54,3540.46 1323.83,3531.17 1360,3531.17 1385,3506.17 1385,3277.07 1435,3227.07 1435,2968.21 1487.5,2915.71 R36AO_M1.2@1537.5,2915.71 1535,2913.21 C13AO_M1.1@1535,2815.71
  BottomLayer w10: S2.3@1522.85,3973.74 1564.23,3973.74 1600,3937.97 1600,3788.42 1671.43,3717 1671.43,3647.69 1617.39,3593.65 R44AO1.1@1617.39,3530.35
  BottomLayer w20: R43AO1.1@1617.39,3277.8 1617.39,3446.17 C17AO1.1@1617.39,3446.26 R44AO1.1@1617.39,3530.35
10V2: C13AO_M2.1 C21AO1.2 C22AO1.1 R36AO_M2.2 R48AO1.1 R49AO1.1 S3.3 S3.6 | length 1787.1
  TopLayer w10: C13AO_M2.1@1057.54,2815.71 1057.54,2913.21 R36AO_M2.2@1060.04,2915.71 1044.29,2915.71 1020,2940 1020,3247.54 992.54,3275 992.54,3519.41 980.78,3531.17 945.58,3531.17 932.54,3544.22 932.54,3952.02 954.25,3973.74 S3.6@1019.95,3973.74 S3.3@1197.11,3973.74
  TopLayer w15: v1(962.64,3314.5) 992.03,3314.5
  BottomLayer w10: R49AO1.1@955,3532.65 R49AO1.1@962.64,3525.01
  BottomLayer w20: C22AO1.1@960.89,3440.82 960.89,3358.28 962.64,3356.54 v1(962.64,3314.5) R48AO1.1@962.64,3272.46 ; C22AO1.1@962.54,3440.82 962.54,3524.9 R49AO1.1@962.64,3525.01
10V3: C13AO_M3.1 C15AO2.2 C17AO2.1 R36AO_M3.2 R43AO2.1 R44AO2.1 S5.3 S5.6 | length 2497.8
  TopLayer w10: S5.3@2174.33,3973.74 S5.6@1997.16,3973.74 1943.74,3973.74 1935,3965 1935,3760 1955,3740 2060.57,3740 2089.5,3711.07 2089.5,3550 2098.79,3540.71 2141.08,3540.71 2160,3521.79 2160,3268.58 2215,3213.58 2215,3063.08 2270.79,3007.29 2270.79,2922.42 2286.42,2906.79 R36AO_M3.2@2325,2906.79
  TopLayer w20: C13AO_M3.1@2325,2809.29 R36AO_M3.2@2325,2906.79
  BottomLayer w20: S5.3@2174.33,3973.74 2290.3,3973.74 2347.39,3916.65 R44AO2.1@2347.39,3537.5 C17AO2.1@2347.39,3453.41 2347.39,3453.32 R43AO2.1@2347.39,3284.95
10V4: C13AO_M4.1 C21AO2.2 C22AO2.1 R36AO_M4.2 R48AO2.1 R49AO2.1 S7.3 S7.6 | length 2266.8
  TopLayer w10: R36AO_M4.2@1842.5,2912.5 1791.79,2963.21 1791.79,3250 1772.5,3269.29 1772.5,3521.79 1761.79,3532.5 1719.5,3532.5 1702,3550 1702,3714.71 1676,3740.71 1640,3740.71 1620,3760.71 1620,3956.26 1637.48,3973.74 S7.6@1671.43,3973.74 S7.3@1848.59,3973.74
  TopLayer w20: C13AO_M4.1@1842.5,2815 R36AO_M4.2@1842.5,2912.5
  BottomLayer w10: S7.6@1671.43,3973.74 1620,3922.31 1620,3796.71 1692.64,3724.07 1692.64,3533.38 R49AO2.1@1692.64,3532.16
  BottomLayer w20: R48AO2.1@1692.64,3279.61 1692.64,3363.69 1691.67,3364.66 1690.89,3365.44 1690.89,3535.13 R49AO2.1@1692.64,3533.38
12V: C19AO1.2 C19AO2.2 C20AO1.1 C20AO2.1 D1.1 D2.1 D4.1 P7.9 P7.10 P8.9 P8.10 pad.2 R34AO_M1.2 R34AO_M2.2 R34AO_M3.2 R34AO_M4.2 R35AO_M1.2 R35AO_M2.2 R35AO_M3.2 R35AO_M4.2 RL1.1 RL2.1 RL3.1 S1.6 S4.6 S6.6 S8.6 U3AO_M1.8 U3AO_M2.8 U3AO_M3.8 U3AO_M4.8 U5AO1.8 U5AO2.8 | length 16895.7
  TopLayer w12: S1.6@981.26,2510 936.64,2554.62 936.64,2735 959.17,2757.53 1184.55,2757.53 ; S4.6@1229.17,2510 1184.55,2554.62 1184.55,2757.53 ; C20AO2.1@1350,3065 1394,3065 1414,3045 1414,2758.53 ; S6.6@1477.09,2510 1432.47,2554.62 1432.47,2757.53 ; S8.6@1725,2510 1680.38,2554.62 1680.38,2735 1657.84,2757.53 1432.47,2757.53 ; 1184.55,2757.53 1432.47,2757.53
  TopLayer w20: 1024.42,1385.58 1029.42,1390.58 ; 1030,975 981.26,926.26 v7(981.26,605) 1026.26,560 RL3.1@1175,560 1176.16,558.84 D4.1@1296,558.84 ; U3AO_M2.8@1087.54,3335.71 1087.54,3430.71 R34AO_M2.2@1102.54,3445.71 1105.04,3448.21 R35AO_M2.2@1105.04,3530.71 1105.04,3584.87 v3(1104.91,3585) ; RL2.1@1175,975 D2.1@1296,975 ; RL1.1@1175,1388 D1.1@1296,1388 ; U3AO_M1.8@1475,3335.71 1475,3430.71 R34AO_M1.2@1490,3445.71 1492.5,3448.21 R35AO_M1.2@1492.5,3530.71 v3@1492.5,3605 ; v3(1725,4024.61) 1725,4110 1740,4125 P7.9@1930,4125 ; U3AO_M4.8@1862.5,3335 1862.5,3430 R34AO_M4.2@1877.5,3445 1880,3447.5 R35AO_M4.2@1880,3530 1880,3582.52 v3(1882.48,3585) ; U3AO_M3.8@2255,3329.29 2255,3424.29 2272.5,3441.79 R35AO_M3.2@2272.5,3524.29 2272.5,3591.79 v3(2275,3594.29) ; v1(2275,3867.88) 2275,4019.55 v1(2310,4054.55)
  TopLayer w30: S1.6@981.26,2510 981.26,1433.74 1024.42,1390.58 1024.42,1385.58 980.68,1341.84 980.68,1024.32 1030,975 RL2.1@1175,975 ; 1029.42,1390.58 1172.42,1390.58 RL1.1@1175,1388 ; P8.9@1090,4125 P8.10@1090,4225 v5(1090,4305) v5@1090,4307.46 ; P7.9@1930,4125 P7.10@1930,4225 v5(1930,4305)
  BottomLayer w20: C19AO1.2@1094.43,3630.57 C19AO1.2@1104.91,3630.57 v3(1104.91,3585) ; U5AO1.8@1184.91,3528.67 1133.77,3528.67 1104.91,3557.53 v3(1104.91,3585) ; 1410,3766.89 1410,3791.89 ; 1435,3766.89 1410,3791.89 ; v3@1492.5,3605 1492.5,3747.5 1473.11,3766.89 1385,3766.89 ; v3(1882.48,3585) 1882.48,3568.25 U5AO2.8@1914.91,3535.82 1863.77,3535.82 1834.91,3564.69 C19AO2.2@1834.91,3637.72 1772.28,3637.72 1755,3655 1755,3994.61 v3(1725,4024.61) 1450,4024.61 1410,3984.61 1410,3791.89 ; P7.9@1930,4107.16 P7.9@1930,4125 2000.45,4054.55 v1(2310,4054.55) 2618.82,4054.55 pad.2@2696.62,4132.35 ; v3(2275,3594.29) v1(2275,3867.88) ; v3(1104.91,3585) 1072.88,3585 1059.91,3597.97 1059.91,3740.43 1086.37,3766.89 1385,3766.89 ; 1385,3766.89 1410,3791.89
  BottomLayer w30: v7(981.26,605) 978.13,608.13 978.13,1811.87 942.5,1847.5 838.07,1847.5 710,1975.57 710,2534.04 634.04,2610 405,2610 370,2645 370,4295 435,4360 1035,4360 v5(1090,4305) v5(1930,4305) ; C20AO2.1@1350,3065 1407.5,3007.5 2072.5,3007.5 C20AO1.1@2130,3065
  other v3: 1492.5,3600
20MA1: Q4AO_M1.1 S2.2 S2.5 | length 344.9
  TopLayer w15: Q4AO_M1.1@1349.17,3650 1349.17,3812.78 S2.5@1345.69,3816.26 S2.2@1522.85,3816.26
20MA2: Q4AO_M2.1 S3.2 S3.5 | length 388
  TopLayer w10: Q4AO_M2.1@968.74,3650 968.74,3805 980,3816.26 S3.5@1019.95,3816.26 S3.2@1197.11,3816.26
20MA3: Q4AO_M3.1 S5.2 S5.5 | length 375.1
  TopLayer w10: S5.5@1997.16,3816.26 S5.2@2174.33,3816.26 2174.33,3755.59 2123.74,3705 Q4AO_M3.1@2123.74,3650 Q4AO_M3.1@2123.74,3639.29
20MA4: Q4AO_M4.1 S7.2 S7.5 | length 375.6
  TopLayer w10: Q4AO_M4.1@1738.74,3645.71 Q4AO_M4.1@1738.74,3650 1738.74,3711.26 1671.43,3778.57 S7.5@1671.43,3816.26 S7.2@1848.59,3816.26
A: F1.1 P7.2 P8.2 P21.1 | length 2805.4
  TopLayer w20: P21.1@740,4200 740,4375 785,4420 v6(1490,4420) P8.2@1490,4225 ; v6(2325,4420) 2330,4415 P7.2@2330,4225 2390,4225 2405,4210 2405,4174.43 2424.43,4155 2585,4155 2603.74,4136.26 2603.74,4051.26 2620,4035 2750,4035 2773.74,4011.26 F1.1@2773.74,3979.49
  BottomLayer w20: v6(1490,4420) v6(2325,4420)
ADC1: F3AI1.1 P6.1 | length 3302.4
  BottomLayer w15: P6.1@826.53,2491.06 883.94,2491.06 965,2410 965,1980 985,1960 1064.91,1960 1104.91,1920 1104.91,715.09 1150,670 1575,670 1610.86,634.14 1610.86,549.14 1650,510 2244.26,510 F3AI1.1@2284.26,550
ADC2: F3AI2.1 P6.3 | length 3099.8
  BottomLayer w15: P6.3@826.53,2325.71 915,2325.71 940,2300.71 940,1955 960,1935 1039.91,1935 1079.91,1895 1079.91,680.09 1115,645 1545.36,645 1585.86,604.5 1585.86,509.14 1610,485 2051.72,485 2081.72,455 2081.72,365.41 F3AI2.1@2088.84,358.29
ADC3: F3AI3.1 P6.5 | length 2462.4
  BottomLayer w15: P6.5@826.53,2160.35 889.65,2160.35 915,2135 915,1935 940,1910 1024.91,1910 1054.91,1880 1054.91,640.09 1075,620 1535,620 1560.86,594.14 F3AI3.1@1560.86,358.29
ADC4: F3AI4.1 P6.7 | length 1808.2
  BottomLayer w15: P6.7@826.53,1995 826.53,1905 851.53,1880 999.91,1880 1029.91,1850 1029.91,490 1030.86,489.05 F3AI4.1@1030.86,358.31
AI1: C12AI1.1 DW1AI1.K S9AI1.4 U1.37 | length 1164.1
  TopLayer w15: U1.37@1932,766 1932,468 1975,425 2080,425 2100,405 2100,291.6 2135.72,255.88 S9AI1.4@2312.83,255.88
  BottomLayer w15: S9AI1.4@2312.83,255.88 2343.74,255.88 2365,234.62 DW1AI1.K@2365,69.62 C12AI1.1@2470,69.62
AI2: C12AI2.1 DW1AI2.K S9AI2.4 U1.36 | length 944.3
  TopLayer w15: S9AI2.4@1785.82,256.25 1881.25,256.25 1901,276 U1.36@1901,766
  BottomLayer w15: S9AI2.4@1785.82,256.25 1816.72,256.25 1837.98,234.99 DW1AI2.K@1837.98,69.99 C12AI2.1@1942.98,69.99
AI3: C12AI3.1 DW1AI3.K S9AI3.4 U1.35 | length 1390
  TopLayer w15: S9AI3.4@1257.83,256.25 1356.25,256.25 1380,280 1380,445.62 1409.38,475 1815,475 1870,530 1870,765 U1.35@1869,766
  BottomLayer w15: S9AI3.4@1257.83,256.25 1288.74,256.25 1310,234.99 DW1AI3.K@1310,69.99 C12AI3.1@1415,69.99
AI4: C12AI4.1 DW1AI4.K S9AI4.4 U1.34 | length 1881.3
  TopLayer w15: S9AI4.4@727.84,256.26 821.26,256.26 850,285 850,465 885,500 1783,500 1838,555 U1.34@1838,766
  BottomLayer w15: S9AI4.4@727.84,256.26 758.74,256.26 780,235 DW1AI4.K@780,70 C12AI4.1@885,70
AI5: C1.1 R2.1 R4.2 U1.33 | length 405.6
  TopLayer w15: v1(1635,854) 1748,854 U1.33@1750,856
  BottomLayer w15: R2.1@1355,877.5 C1.1@1440,877.5 R4.2@1525,877.5 1526.5,877.5 1550,854 v1(1635,854)
AI6: C4.1 R9.1 R13.2 U1.32 | length 421.9
  TopLayer w15: v1(1590,885) U1.32@1750,885
  BottomLayer w15: R9.1@1355,950 C4.1@1440,950 R13.2@1525,950 v1(1590,885)
AO1: R45AO1.2 U1.43 | length 4297.3
  TopLayer w15: U1.43@2121,768 2121,671 2136.5,655.5 2250.5,655.5 2265,670 v1(2265,693.5)
  BottomLayer w15: R45AO1.2@1199.55,3283.67 1154.2,3283.67 1131.78,3261.25 1131.78,3028.22 1185,2975 2435,2975 2475,2935 2475,1408.57 2297.49,1231.06 2297.49,725.99 v1(2265,693.5)
AO2: R50AO1.2 U1.44 | length 4654.3
  TopLayer w15: U1.44@2152,768 2152,698 2156.5,693.5 v1(2222.49,693.5)
  BottomLayer w15: R50AO1.2@1357.43,3630.46 1303.44,3576.47 1303.44,3398.94 1247.65,3343.15 1123.98,3343.15 1101.78,3320.96 1101.78,2988.22 1140,2950 2410,2950 2450,2910 2450,1418.92 2272.49,1241.41 2272.49,743.5 v1(2222.49,693.5)
AO3: R45AO2.2 U1.41 | length 3900.1
  TopLayer w12: U1.41@2058,768 2058,652 2100,610 2360.01,610 2380,629.99 v1(2380,693.5)
  BottomLayer w15: R45AO2.2@1929.55,3290.82 1884.2,3290.82 1861.78,3268.41 1861.78,3235.72 1861.78,3185 1891.78,3155 2505,3155 2525,3135 2525,1387.85 2347.49,1210.34 2347.49,726.01 v1(2380,693.5)
AO4: R50AO2.2 U1.42 | length 4235.4
  TopLayer w12: U1.42@2089,768 2089,652.11 2109.11,632 2298.5,632 2322.49,655.99 v1(2322.49,693.5)
  BottomLayer w10: 1853.98,3350.3 1977.65,3350.3 2007.68,3380.33 2007.68,3563.12 R50AO2.2@2082.17,3637.61
  BottomLayer w12: R50AO2.2@2082.17,3637.61 R50AO2.2@2087.43,3637.61
  BottomLayer w15: 1853.98,3350.3 1831.78,3328.11 1831.78,3260 1831.78,3168.22 1870,3130 2475,3130 2500,3105 2500,1398.21 2322.49,1220.7 v1(2322.49,693.5)
AREF: C5.2 U1.29 | length 142.7
  TopLayer w12: U1.29@1750,982 v1(1838,982)
  BottomLayer w12: v1(1838,982) C5.2@1892.74,982
B: F2.1 P7.1 P8.1 P21.2 | length 3271.7
  TopLayer w20: P21.2@540,4200 540,4400 620,4480 v6(1565,4480) 1565,4149.17 1540.83,4125 P8.1@1490,4125 ; P7.1@2330,4125 2540,4125 2573.74,4091.26 F2.1@2573.74,3979.49
  BottomLayer w20: v6(1565,4480) 2370,4480 2400,4450 2400,4149.17 2375.83,4125 P7.1@2330,4125
DI1: OP1.16 R15.1 U1.15 | length 1688.4
  TopLayer w15: U1.15@2058,1258 2058,1352.64 2090,1384.64 2090,1558.36 1982,1666.36 1982,2377 2010,2405 2244,2405 2275,2436 v1(2275,2510)
  BottomLayer w15: OP1.16@2275,2445 v1(2275,2510) R15.1@2275,2565
DI2: OP1.14 R18.1 U1.16 | length 1628
  TopLayer w15: U1.16@2026,1258 2026,1356 2065,1395 2065,1548 1957,1656 1957,2412 1975,2430 2154.33,2430 2174.33,2450 v1(2174.33,2510)
  BottomLayer w15: OP1.14@2175,2445 2175,2510 R18.1@2175,2565
DI3: OP1.12 R24.1 U1.19 | length 1483.1
  TopLayer w15: U1.19@1932,1258 1932,2431.64 1955.36,2455 2043.94,2455 2075,2486.06 v1(2075,2510)
  BottomLayer w15: OP1.12@2075,2445 v1(2075,2510) R24.1@2075,2565
DI4: OP1.10 R28.1 U1.20 | length 1402.7
  TopLayer w15: U1.20@1901,1258 1901,2436 v1(1975,2510)
  BottomLayer w15: OP1.10@1975,2445 v1(1975,2510) R28.1@1975,2565
DO1: R3.2 U1.14 | length 1234.8
  TopLayer w15: R3.2@1394.38,1410 1520,1410 1540,1390 1540,1045 1555,1030 v1(1580,1030) ; v1(2051.72,1110) 2089,1147.28 U1.14@2089,1256
  BottomLayer w15: v1(1580,1030) 1580,1070 1602.5,1092.5 2034.22,1092.5 v1(2051.72,1110)
DO2: R8.2 U1.13 | length 940.5
  TopLayer w15: R8.2@1394.38,995 v1(1615,995) ; v1(2080,1083.18) 2084.18,1083.18 2121,1120 U1.13@2121,1256
  BottomLayer w15: v1(1615,995) 1615,1039.64 1635.36,1060 2056.82,1060 v1(2080,1083.18)
DO3: R14.2 U1.12 | length 1346.3
  TopLayer w15: R14.2@1394.38,580 1404.11,589.72 1527.72,589.72 1560,622 1560,930 1590,960 v1(1645,960) ; v1(2110,1050) 2152,1092 U1.12@2152,1256
  BottomLayer w15: v1(1645,960) 1645,1015 1657,1027 2087,1027 v1(2110,1050)
G_DI1: P9.2 S1.1 | length 996.6
  BottomLayer w15: P9.2@610,3222.33 707.67,3222.33 755,3175 755,2680 790,2645 1017.84,2645 S1.1@1060,2687.17
G_DI2: P9.4 S4.1 | length 1177.2
  BottomLayer w15: P9.4@610,3056.97 723.03,3056.97 730,3050 730,2659.64 769.64,2620 1295,2620 1307.91,2632.91 S4.1@1307.91,2687.17 S4.1@1307.91,2697.17
G_DI3: P9.6 S6.1 | length 1312.3
  BottomLayer w15: P9.6@610,2891.62 688.38,2891.62 705,2875 705,2622.67 732.67,2595 1545,2595 1555.83,2605.83 S6.1@1555.83,2687.17 S6.1@1555.83,2697.17
G_DI4: P9.8 S8.1 | length 1430.3
  BottomLayer w15: P9.8@610,2726.26 668.74,2726.26 680,2715 680,2610 720,2570 1775,2570 1803.74,2598.74 S8.1@1803.74,2687.17 S8.1@1803.74,2697.17